# EAGLE board vga2 (EAGLE 7.3.0)
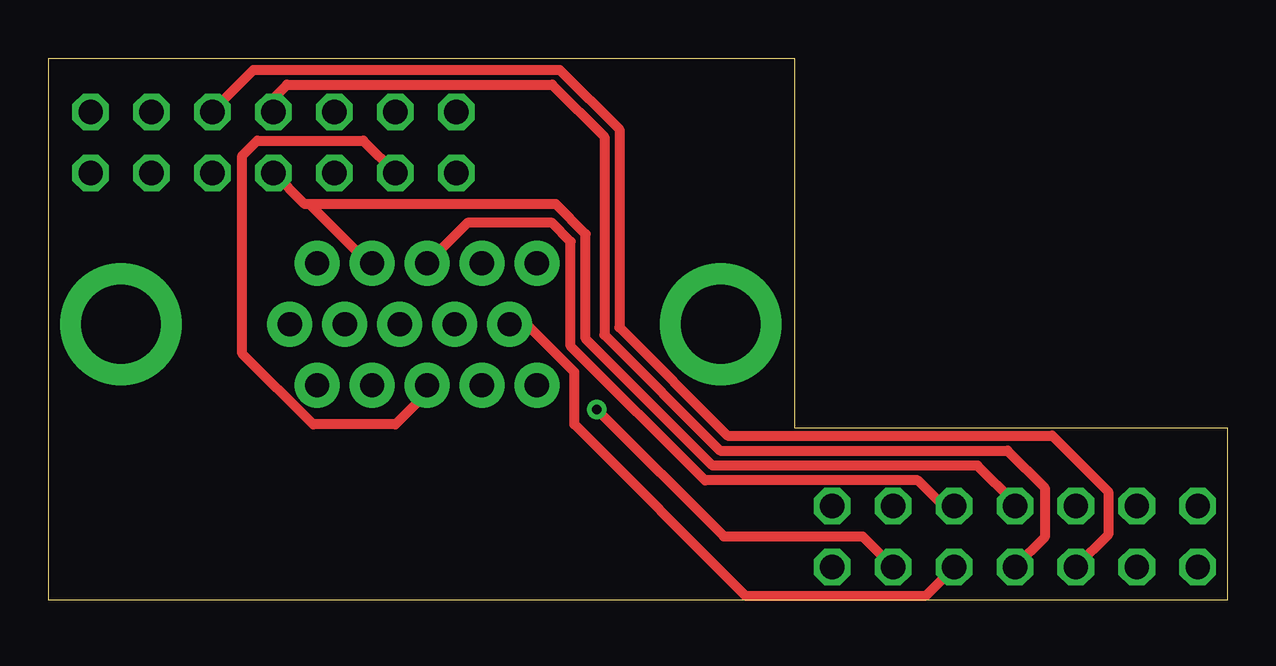
[diagram p0: board, top side]
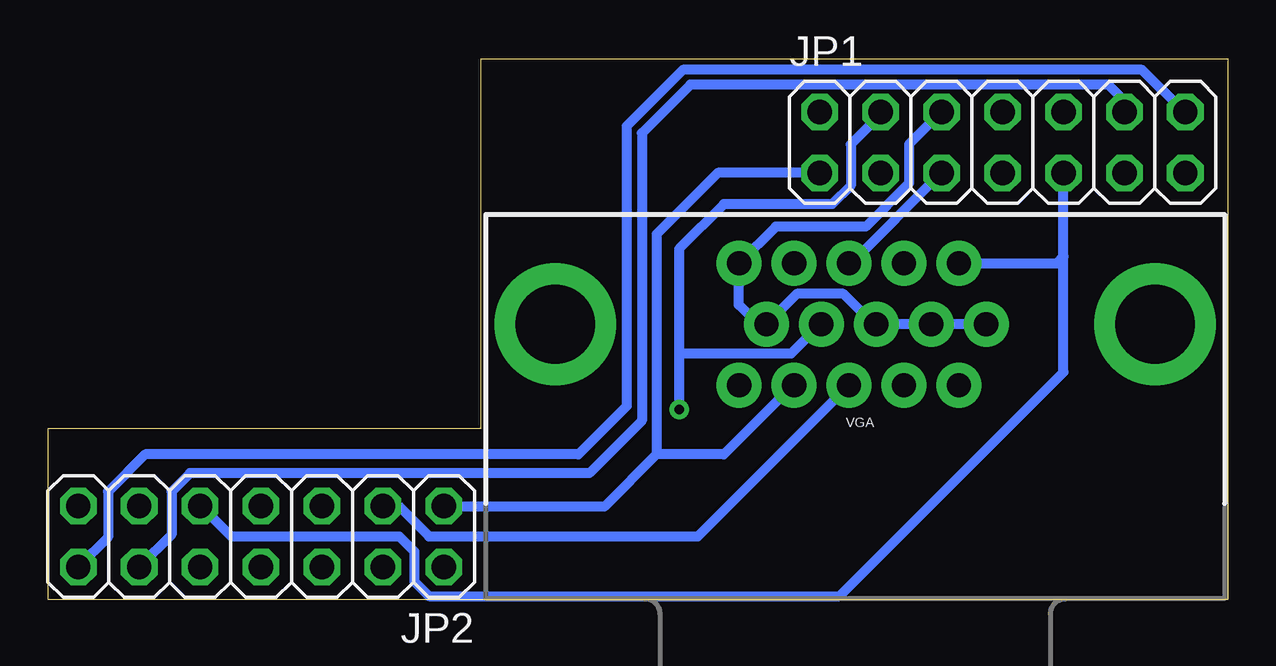
[diagram p1: board, bottom side, seen from below]

No outline drawn. Coordinates in mm, seen from the top.
Copper layers (1*16): Top 0.035mm / dielectric 1.5mm / Bottom 0.035mm
Design rules "default": minimum track width 10mil, minimum drill 24mil, track to track 8mil, track to pad 8mil, pad to pad 8mil, via to via 8mil, smd to smd 8mil, copper to edge 40mil, drill to drill 8mil, minimum pad ring 10mil, minimum via ring 8mil, stop-mask expansion 4mil, vias tented up to drill 0mil, thermal gap 10mil
Milling: 6 lines

## Footprints (pad centres in the part's own frame; a part is rotated, then mirrored left to right if it is on the bottom)
2X07 = drill 1.016 octagon: 1 -7.62,-1.27; 2 -7.62,1.27; 3 -5.08,-1.27; 4 -5.08,1.27; 5 -2.54,-1.27; 6 -2.54,1.27; 7 0,-1.27; 8 0,1.27; 9 2.54,-1.27; 10 2.54,1.27; 11 5.08,-1.27; 12 5.08,1.27; 13 7.62,-1.27; 14 7.62,1.27
DB15 = drill 1.016 pad 1.88: 1 -4.32,-7.62; 2 -2.03,-7.62; 3 0.26,-7.62; 4 2.55,-7.62; 5 4.84,-7.62; 6 -5.46,-5.08; 7 -3.17,-5.08; 8 -0.88,-5.08; 9 1.41,-5.08; 10 3.7,-5.08; 11 -4.32,-2.54; 12 -2.03,-2.54; 13 0.26,-2.54; 14 2.55,-2.54; 15 4.84,-2.54 | drill 3.302 pad 5.08: G1 -12.5,-5.08; G2 12.5,-5.08

## Placement (x,y rotation side)
JP1  RGB/JTAG  [2X07]  9.39,19.06 0 bottom
JP2  RGB/JTAG  [2X07]  40.29,2.64 180 bottom
VGA  DB15  [DB15]  15.53,6.41 180 bottom

## Library data of the parts
JP1 JP2 = pinhead
VGA = SparkFun-Connectors

## Nets
3.3V: JP1.4 JP2.4 VGA.9
BLUE: JP1.5 JP2.5 VGA.3
CSYNC: JP1.3 JP2.3 VGA.13
GND: JP1.6 JP2.6 VGA.5 VGA.6 VGA.7 VGA.8 VGA.10
GREEN: JP1.7 JP2.7 VGA.2
RED: JP1.9 JP2.9 VGA.1
TCK: JP1.8 JP2.8
TDI: JP1.12 JP2.12
TDO: JP1.10 JP2.10
TMS: JP1.14 JP2.14
VSYNC: JP1.1 JP2.1 VGA.14

## Tracks (layer width: path | path; a pad name or v marks a point on that pad's centre or on a via)
3.3V  (via drill 0.4)
  Top 0.406: v22.87,7.93 28.16,2.65 33.94,2.65 JP2.4
  Bottom 0.406: 22.87,10.27 v22.87,7.93 | VGA.9 16.98,11.49 18.2,10.27 22.87,10.27 | JP1.4 14.47,20.23 15.71,18.98 15.71,17.27 16.49,16.49 21,16.49 22.87,14.62 22.87,10.27
BLUE
  Top 0.406: JP2.5 37.31,3.92 36.25,4.98 27.38,4.98 21.78,10.58 21.78,14.94 21,15.71 17.48,15.71 VGA.3
  Bottom 0.406: VGA.3 15.69,14.03 JP1.5
CSYNC
  Top 0.406: VGA.13 15.79,8.63 14.47,7.31 11.05,7.31 8.09,10.27 8.09,18.51 8.71,19.14 13.12,19.14 JP1.3
  Bottom 0.406: JP2.3 34.56,3.92 33.29,2.65 22.09,2.65 VGA.13
GND
  Top 0.406: JP2.6 37.75,1.35 36.56,0.16 29.09,0.16 21.94,7.31 21.94,9.49 19.91,11.51 19.29,11.51 19.27,11.49 VGA.10
  Bottom 0.406: VGA.6 VGA.7 VGA.8 14.75,11.49 16.02,12.76 17.96,12.76 VGA.10 19.58,11.49 20.38,12.29 20.38,14.02 VGA.5 18.84,15.56 15.09,15.56 13.28,17.37 13.28,18.98 JP1.6
GREEN
  Top 0.406: JP2.7 40.29,4.04 38.74,5.6 27.69,5.6 22.4,10.89 22.4,15.25 21.16,16.49 10.89,16.49 | 10.89,16.49 10.69,16.49 JP1.7 | VGA.2 13.35,14.03 10.89,16.49
RED
  Bottom 0.406: 6.84,14.31 6.84,9.49 16.18,0.16 33.29,0.16 33.91,0.78 33.91,2.02 34.54,2.65 41.54,2.65 42.81,3.92 JP2.9 | 6.84,14.31 JP1.9 | VGA.1 7.13,14.03 6.84,14.31
TCK
  Top 0.406: JP1.8 9.39,20.9 9.96,21.47 21,21.47 23.18,19.29 23.18,11.05 28,6.22 39.98,6.22 41.54,4.67 41.54,2.62 JP2.8
TDI
  Bottom 0.406: JP1.12 4.31,20.8 4.98,21.47 22.4,21.47 24.43,19.45 24.43,7.47 26.6,5.29 43.25,5.29 44.03,4.51 44.03,2.72 JP2.12
TDO
  Top 0.406: JP2.10 44.18,2.72 44.18,4.51 41.85,6.84 28.32,6.84 23.8,11.36 23.8,19.6 21.31,22.09 8.56,22.09 6.85,20.38 JP1.10
TMS
  Bottom 0.406: JP1.14 1.82,20.33 3.58,22.09 22.71,22.09 25.05,19.76 25.05,8.09 27.07,6.07 45.12,6.07 46.67,4.51 46.67,2.62 JP2.14
VSYNC
  Bottom 0.406: JP1.1 21.26,17.79 23.8,15.25 23.8,6.07 | JP2.1 32.65,3.89 25.98,3.89 23.8,6.07 | VGA.14 18.12,8.95 21,6.07 23.8,6.07